# Altium PCB Encoder.PcbDoc
Units mm, origin at the board's own origin, x right, y up, seen from the top; angles counter-clockwise.
Board outline 56.4 x 60.4 mm, 2 copper layers (Top Layer, Bottom Layer); 22 components, 13 nets, 67 pads, 0 vias.
Unrouted connection lines stored in the file: 46.
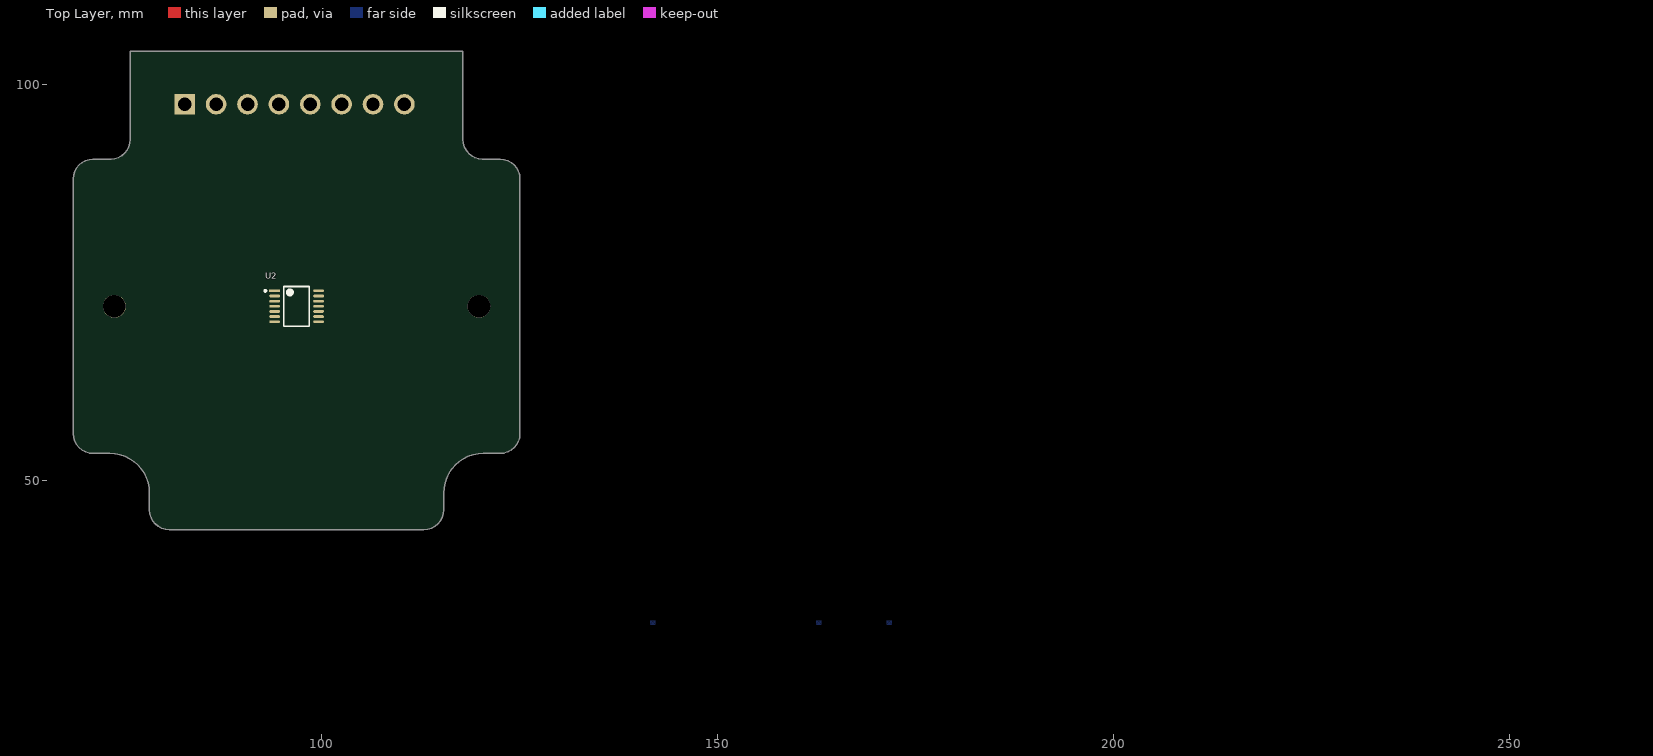
[diagram p0: Top Layer view]
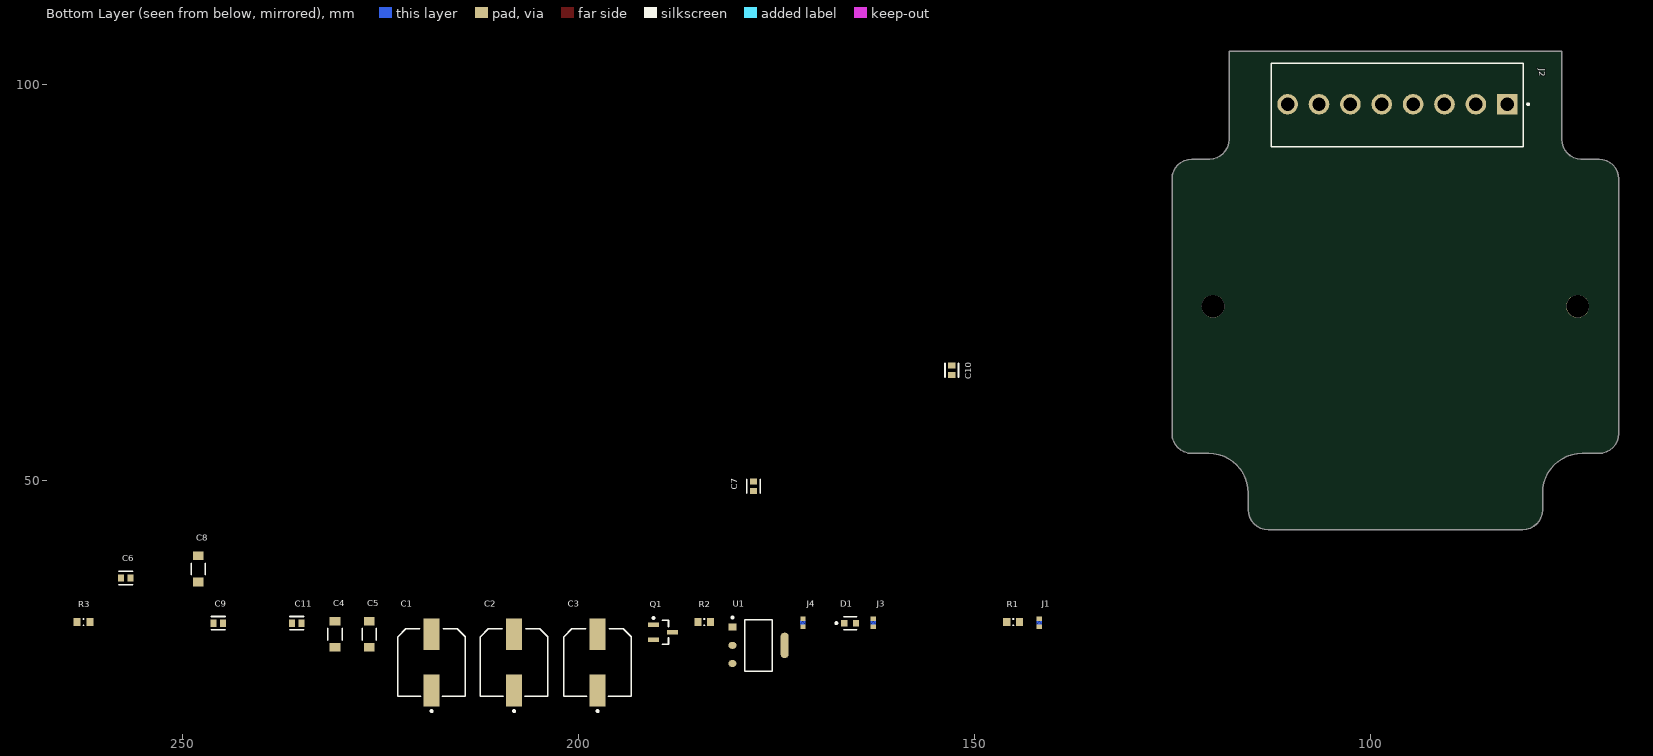
[diagram p1: Bottom Layer view, seen from below]

## Layer stack, top to bottom
Top Solder: solder mask 0.0102, Solder Resist, Dk 3.5
Top Layer: signal copper 0.0356
Dielectric 1: dielectric 0.32, FR-4, Dk 4.8
Bottom Layer: signal copper 0.0356
Bottom Solder: solder mask 0.0102, Solder Resist, Dk 3.5

## Board outline
73.331,90.579 73.471,90.581 73.949,90.641 74.406,90.791 74.826,91.026 75.193,91.337 75.494,91.713 75.717,92.139 75.855,92.601 75.901,93.08 75.901,104.209 117.901,104.209 117.901,93.08 117.947,92.601 118.085,92.139 118.308,91.713 118.609,91.337 118.976,91.026 119.396,90.791 119.853,90.641 120.331,90.581 120.471,90.579 122.601,90.579 123.089,90.531 123.558,90.389 123.99,90.158 124.369,89.847 124.68,89.468 124.911,89.036 125.053,88.567 125.101,88.079 125.101,55.939 125.053,55.451 124.911,54.982 124.68,54.55 124.369,54.171 123.99,53.86 123.558,53.629 123.089,53.487 122.601,53.439 120.471,53.439 119.818,53.396 119.177,53.269 118.558,53.058 117.971,52.769 117.427,52.406 116.935,51.975 116.504,51.483 116.141,50.939 115.852,50.352 115.641,49.733 115.514,49.092 115.471,48.439 115.471,46.309 115.423,45.821 115.281,45.352 115.05,44.92 114.739,44.541 114.36,44.23 113.928,43.999 113.459,43.857 112.971,43.809 80.831,43.809 80.343,43.857 79.874,43.999 79.442,44.23 79.063,44.541 78.752,44.92 78.521,45.352 78.379,45.821 78.331,46.309 78.331,48.439 78.288,49.092 78.161,49.733 77.95,50.352 77.661,50.939 77.298,51.483 76.867,51.975 76.375,52.406 75.831,52.769 75.244,53.058 74.625,53.269 73.984,53.396 73.331,53.439 71.201,53.439 70.713,53.487 70.244,53.629 69.812,53.86 69.433,54.171 69.122,54.55 68.891,54.982 68.749,55.451 68.701,55.939 68.701,88.079 68.749,88.567 68.891,89.036 69.122,89.468 69.433,89.847 69.812,90.158 70.244,90.389 70.713,90.531 71.201,90.579

## Design rules (kind name [scope] priority, off if disabled: settings)
Clearance [All] p1: gap=0.254 ignorepadtopadclearanceinfootprint=FALSE
PolygonConnect [All] p1: connectstyle=Relief reliefconductorwidth=0.254 reliefentries=4 polygonreliefangle="90 Angle" airgapwidth=0.254
RoutingVias [All] p1: holewidth=0.711 width=1.27 viastyle="Through Hole" minholewidth=0.711 minwidth=1.27 maxholewidth=0.711 maxwidth=1.27
SolderMaskExpansion [All] p1: expansion=0.102 istentingtop=FALSE
Width [All] p1: maxlimit=0.254 minlimit=0.254 preferedwidth=0.254
30 further rules are at their usual default settings.

## Components (designator, comment, footprint, x,y, rotation, side; value= is the part's Value field where it differs from the comment)
C1 "100u" FP-FTF-MFG 218.567,27.051 r90 bottom
C2 "100u" FP-FTF-MFG 208.153,27.051 r90 bottom
C3 "100u" FP-FTF-MFG 197.612,27.051 r90 bottom
C4 "22u" FP-C3216-085-0_2-MFG 230.759,30.607 r90 bottom
C5 "22u" FP-C3216-085-0_2-MFG 226.441,30.607 r90 bottom
C6 "100n" FP-C0603C-CF-MFG 257.175,37.719 r180 bottom value="0.10 μF"
C7 "100n" FP-C0603C-CF-MFG 177.927,49.276 r90 bottom value="0.10 μF"
C8 "22u" FP-C3216-085-0_2-MFG 248.031,38.862 r90 bottom
C9 "100n" FP-C0603C-CF-MFG 245.491,32.004 r180 bottom value="0.10 μF"
C10 "100n" FP-C0603C-CF-MFG 152.908,63.916 r90 bottom value="0.10 μF"
C11 "100n" FP-C0603C-CF-MFG 235.585,32.004 r180 bottom value="0.10 μF"
D1 "LTST-C190KRKT" FP-LTST-C190KRKT-MFG 165.735,32.004 r180 bottom
J1 "JUMPER" JUMPER 141.859,32.004 r180 bottom
J2 "26-60-4080" FP-26-60-4080-MFG 96.647,97.409 r180 bottom
J3 "JUMPER" JUMPER 162.814,32.004 r180 bottom
J4 "JUMPER" JUMPER 171.704,32.004 r180 bottom
Q1 "2N7002" INF-PG-SOT23_M 189.357,30.861 r180 bottom
R1 "220R" RESC0603(1608)_N 145.161,32.131 r180 bottom value="2000.00 Ohm"
R2 "1k" RESC0603(1608)_N 184.15,32.131 r180 bottom value="2000.00 Ohm"
R3 "100k" RESC0603(1608)_N 262.509,32.131 r180 bottom value="2000.00 Ohm"
U1 "AMS1117-3.3" FP-AMS1117-IPC_C 177.292,29.21 r180 bottom
U2 "AS5048A-HTSP-500" FP-AS5048A-HTSP-500-IPC_C 96.901,72.009 r0 top

## Footprints (in the part's own frame and the unit in brackets; to place one, negate y for a bottom-side part, rotate by r counter-clockwise, add the part's x,y. Pads: shape width x height; smd on the part's side, far side on the other; paste and mask are expansions set on the pad)
FP-26-60-4080-MFG [mm]
  rect 2.6x2.6 hole 1.7 paste-2539.97 mask+0: 1(13.86,0.105)
  round 2.6 hole 1.7 paste-2539.97 mask+0: 2(9.9,0.105) 3(5.94,0.105) 4(1.98,0.105) 5(-1.98,0.105) 6(-5.94,0.105) 7(-9.9,0.105) 8(-13.86,0.105)
  silkscreen extent -15.9,-5.26 16.62,5.26, body extent -15.77,-5.01 15.77,5, height 15.36
FP-AMS1117-IPC_C [mm]
  rect 1.004x0.872 smd paste+0 mask+0: 1(-3.295,2.29)
  rrect100% 1.004x0.872 smd paste+0 mask+0: 2(-3.295,0) 3(-3.295,-2.29)
  rrect87% 1.004x3.182 smd paste+0 mask+0: 4(3.295,0)
  silkscreen extent -3.42,-3.25 1.75,3.62, body extent -3.53,-3.25 3.53,3.25, height 1.8
FP-AS5048A-HTSP-500-IPC_C [mm]
  rect 1.355x0.341 smd paste+0 mask+0: 1(-2.775,1.95)
  rrect100% 1.355x0.341 smd paste+0 mask+0: 2(-2.775,1.3) 3(-2.775,0.65) 4(-2.775,0) 5(-2.775,-0.65) 6(-2.775,-1.3) 7(-2.775,-1.95) 8(2.775,-1.95) 9(2.775,-1.3) 10(2.775,-0.65) 11(2.775,0) 12(2.775,0.65) 13(2.775,1.3) 14(2.775,1.95)
  silkscreen extent -4.08,-2.5 1.6,2.5
FP-C0603C-CF-MFG [mm]
  rect 0.75x0.9 smd paste+0 mask+0: 1(-0.6,0) 2(0.6,0)
  silkscreen extent -0.87,-0.85 0.88,0.85, body extent -0.8,-0.4 0.8,0.4, height 0.87
FP-C3216-085-0_2-MFG [mm]
  rect 1.1x1.35 smd paste+0 mask+0: 1(-1.65,0) 2(1.65,0)
  silkscreen extent -0.72,-0.9 0.72,0.9, body extent -1.6,-0.8 1.6,0.8, height 1
FP-FTF-MFG [mm]
  rect 4x2 smd paste+0 mask+0: 1(-3.55,0) 2(3.55,0)
  silkscreen extent -6.27,-4.25 4.25,4.25, body extent -4.85,-4.15 4.85,4.15, height 10.5
FP-LTST-C190KRKT-MFG [mm]
  rect 0.8x0.8 smd paste+0 mask+0: 1(-0.75,0) 2(0.75,0)
  silkscreen extent -1.86,-0.82 0.82,0.82, body extent -0.8,-0.4 0.8,0.4, height 0.9
INF-PG-SOT23_M [mm] "SOT23, 3-Leads, Body 2.9x1.3mm, Pitch 0.95mm, IPC Low Density"
  rect 1.35x0.6 smd: 1(-1.2,0.95) 2(-1.2,-0.95) 3(1.2,0)
  silkscreen extent -1.33,-1.5 0.7,1.92, body extent -0.7,-1.5 0.7,1.5, height 1.1
JUMPER [mm]
  rect 0.65x0.55 smd paste-2.54 mask-2.54: 1(0,-0.45) 2(0,0.55)
  Top Layer region: -0.325,-0.175 0.003,0.152 0.325,-0.175
  Top Layer region: -0.325,-0.041 0,0.284 0.325,-0.041 0.325,0.317 -0.325,0.318
RESC0603(1608)_N [mm] "Chip Resistor, Body 1.6x0.8mm, IPC Medium Density"
  rect 0.9x1 smd: 1(-0.8,0) 2(0.8,0)
  silkscreen extent -0.05,-0.4 0.05,0.4, body extent -0.85,-0.47 0.85,0.47, height 0.6

## Part data
C1 C2 C3: library part CMP-05427-000092-1, "CAP ALUM 220UF 20% 50V SMD", Capacitance=220uF, Case/Package=Radial, Dielectric Material=Aluminium, ESR (Equivalent Series Resistance)=180mR, Leakage Current=110uA, Max Operating Temperature=105°C, Min Operating Temperature=-55°C, Package Quantity=500, Ripple Current=670mA, Tolerance=20%, Voltage=50V, Construction=Cylindrical, Contact Plating=Tin, Diameter=8mm, Height=10.2mm, Height - Seated (Max)=0.413inch, Lead Diameter=0.9mm, Lead Free="Lead Free", Lead Pitch=3.1mm, Length=10.2mm, Life (Hours)=2000Hour, Mount="Surface Mount", Number of Pins=2, Packaging="Tape and Reel", Radiation Hardening=No, REACH SVHC="No SVHC", Ripple Current (AC)=670mA, RoHS Compliant=Yes, Series=FT, Termination=SMD/SMT, Voltage Rating=50V, Voltage Rating (DC)=50V
C4 C5 C8: library part CMP-08246-004858-1, "Multilayer Ceramic Capacitors 22μF ±20% 6.3V X5R SMD 1206", Capacitance=22uF, Case Code (Imperial)=1206, Case Code (Metric)=3216, Dielectric=X5R, Dielectric Material=Ceramic, Max Operating Temperature=85°C, Min Operating Temperature=-55°C, Package Quantity=1, Tolerance=20%, Voltage Rating=6.3V, Case/Package=1206, Depth=1.6mm, Height=0.85mm, Lead Free="Lead Free", Length=0.126inch, Mount="Surface Mount", Number of Pins=2, Packaging="Cut Tape", REACH SVHC="No SVHC", Resistor Type=Ceramic, RoHS Compliant=Yes, Series=C, Termination=SMD/SMT, Thickness=0.037inch, Voltage Rating (DC)=6.3V, Weight=0.000571oz, Width=0.063inch
C6 C7 C9 C10 C11: library part CMP-2006-03061-2, "CAP CER 0.1UF 50V X7R 0603", Capacitance="0.10 μF", Manufacturer=KEMET, Manufacturer Part Number=C0603C104K5RACTU, Package=C0603C-CF, Temperature="-55°C to +125°C", Temperature Characteristic=X7R, Temperature Coefficient=30ppm/°C, Temperature Range High=+125°C, Temperature Range Low=-55°C, Tolerance=0.1, Voltage Rating="50 V", Automotive=Yes, Automotive Grade="Grade 1", Category=Cap, ComponentLink2Description=Datasheet, ComponentLink2URL=https://api.kemet.com/component-edge/download/datasheet/C0603C100J5GACAUTO.pdf, Device Class L1="Passive Components", Device Class L2=Capacitors, Device Class L3="Ceramic Capacitors", Digikey Description="CAP CER 0.1UF 50V X7R 0603", Height=0.87mm, Lead Free=Yes, Material=Ceramic, Octopart=https://octopart.com/c0603c104k5ractu-kemet-139244, RoHS=TRUE
D1: library part CMP-1674-00011-2, "LED RED CLEAR CHIP SMD", Case Code (Imperial)=0603, Case Code (Metric)=1608, Color=Red, Forward Current=30mA, Forward Voltage=2.4V, Lens Color=Colorless, Max Operating Temperature=85°C, Min Operating Temperature=-55°C, Package Quantity=1, Power Dissipation=75mW, Reverse Voltage=5V, Test Current=20mA, Case/Package=0603, Depth=0.8mm, Dominant Wavelength=631nm, Height=0.8mm, Illumination Color=Red, Lead Free="Lead Free", Length=1.6mm, Lens Style=Diffused, Lens Transparency=Clear, Luminous Intensity=54mcd, Mount="Surface Mount", Number of Elements=1, Number of LEDs=1, Number of Pins=2, Packaging="Tape and Reel", Power Rating=75mW, Radiation Hardening=No, Viewing Angle=130°, Wavelength=639nm, Width=0.8mm
J1 J3 J4: library part CMP-009-00061-2, Pins=2
J2: library part CMP-00257-00111878-1, "26-60-4080 3.96mm (.156\") Pitch KK® Solid Header, Vertical, Friction Lock, 8 Circuits, Tin (Sn) Plating", Color=Natural, Contact Resistance=6mΩ, Current Rating=7A, Flammability Rating="UL94 V-0", Insulation Resistance=50GΩ, Manufacturer Lifecycle Status=ACTIVE, Max Operating Temperature=75°C, Max Voltage Rating (AC)=250V, Min Operating Temperature=-40°C, Approvals="CSA, UL", Contact Gender=Male, Contact material="Brass, Tin", Contact Plating=Tin, Country of Origin=US, Depth=10.01mm, Gender=Male, Glow Wire Compliant=Non-compliant, Height=14.73mm, Housing Color=Natural, Housing material=Polyester, Lead Free="Lead Free", Lead Pitch=3.96mm, Length=31.55mm, Lifecycle Status=Production, Material=Polyester, Max Current Rating=7A, Mount="Through Hole", NexarPartId=111878, Number of Circuits=8, Number of Contacts=8, Number of Lines=1, Number of Pins=8, Number of Poles=8, Number of Positions=8, Number of Rows=1, Orientation=Vertical, Packaging=Bulk, Pitch=3.96mm, Plating=Tin, Radiation Hardening=No, REACH SVHC=Unknown, RoHS=Compliant, Schedule B=8536694040, Termination=Solder, Voltage Rating=250V, Voltage Rating (AC)=250V, Voltage Rating (DC)=250V
Q1: library part CMP-1149-00026-1, "N-Channel OptiMOS Small-Signal-Transistor, 60 V VDS, 0.3 A ID, -55 to 150 degC, PG-SOT23, Reel, Green", Manufacturer=Infineon, ComponentLink1Description="Manufacturer URL", ComponentLink1URL=http://www.infineon.com/, ComponentLink2Description=Datasheet, ComponentLink2URL=http://www.infineon.com/dgdl/2N7002_Rev2.4.pdf?folderId=db3a3043156fd573011622e10b5c1f67&fileId=db3a304319bc939a0119c2a9461e79e6, ComponentLink3Description="Package Specification", ComponentLink3URL=http://www.infineon.com/dgdl/SOT23-Package_Overview.pdf?folderId=db3a30431936bc4b0119532290053c66&fileId=db3a30431936bc4b0119533468123c85, DatasheetVersion="Rev. 2.4", Green=TRUE, Halogen-free=TRUE, ID (max)="0.3Â A", IDpuls (max)="1.2Â A", Mounting Technology="Surface Mount", PackageDescription="3-Pin Small Outline Transistor Package, 2.9 x 1.3 mm Body, 0.95 mm Pitch", PackageReference=PG-SOT23, PackageVersion=Apr-08, Packing=Reel, PartNumber=2N7002, Ptot (max)="0.5Â W", QG="0.4Â nC", RDS (on) (max)="3,000 mOhm", RDS (on) (max) (@4.5V)="4,000 mOhm", RthJA (max)="250 K/W", VDS (max)="60 V", VGS(th) (max)="2.5Â V", VGS(th) (min)="1.5Â V"
R1: library part CMP-1012-00081-1, "0.1W 1% 0603 (1608 Metric)  SMD", Case-EIA=0603, Case-Metric=1608, Power="0.1 W", Tolerance="5 %", Technology=SMT
R2 R3: library part CMP-1012-00081-1, "2K 0.1W 5% 0603 (1608 Metric)  SMD", Case-EIA=0603, Case-Metric=1608, Power="0.1 W", Tolerance="5 %", Technology=SMT
U1: library part CMP-209535-000001-1, "LDO Voltage Regulators 1A, 3.3V", Dropout Voltage=1.1V, Manufacturer="Advanced Monolithic Systems", Max Junction Temp=+125°C, Max Power Dissipation=1.2W, Max Supply Voltage=15V, Nominal Supply Current=5mA, Output Current=1A, Output Voltage=3.3V, Package=AMS1117, Temperature="-40°C to +125°C", Temperature Range Low=-40°C, Automotive=No, Category=IC, ComponentLink2Description=Datasheet, ComponentLink2URL=http://www.advanced-monolithic.com/pdf/ds1117.pdf, Device Class L1="Integrated Circuits (ICs)", Device Class L2="Power Management ICs", Device Class L3="Voltage Regulators - Linear", Height=1.8mm, Ipc Land Pattern Name=SOT229P700X180-4, Lead Free=Yes, Manufacturer Part Number=AMS1117-3.3, Number Of Outputs=1, Octopart=https://octopart.com/ams1117-3.3-advanced+monolithic+systems-25899300, Output Type=Fixed, RoHS=TRUE, Standoff Height=0.64mm, Temperature Range High=+125°C
U2: library part CMP-22826-000004-1, "SENSOR ANGLE 360DEG SMD", Case/Package=TSSOP, Max Operating Temperature=150°C, Max Supply Voltage=5.5V, Min Operating Temperature=-40°C, Min Supply Voltage=4.5V, Operating Supply Current=15mA, Package Quantity=500, Lead Free="Lead Free", Mount="Surface Mount", Packaging="Tape and Reel", Resolution=14b, Sensing Method="Hall Effect", Termination=SMD/SMT

## Free pads (board coordinates)
  round 2.87 hole 2.87: 1(73.888,72.009) 1(119.913,72.009)

## Nets (pads, with @x,y where several pads share a name; then routed paths per layer and width w, separated by ;. In a path a pad name is that pad's centre, name@x,y a point inside that pad or via, vN(x,y) a via of type N, cw(c..) or ccw(c..) an arc to the next point about the centre after c; other vN are vias at no path point)
3V3: J2.8 J3.1
+5: C1.2 C4.1 C6.1 J1.1 J2.7 U1.3
CLK: J2.6 U2.2
CS: J2.2 U2.1
GND: C1.1 C2.1 C3.1 C4.2 C5.2 C6.2 C7.2 C8.2 C9.2 C10.2 C11.2 J2.1 J2.5 Q1.2 R3.2 U1.1 U2.13
MISO: J2.4 U2.3
MOSI: J2.3 U2.4
NetC2_2: C2.2 C3.2 C5.1 C7.1 C8.1 C9.1 C10.1 C11.1 J1.2 J3.2 J4.2 R1.2 U2.11 U2.12
NetD1_1: D1.1 Q1.3
NetD1_2: D1.2 R1.1
NetJ4_1: J4.1 U1.2 U1.4
NetQ1_1: Q1.1 R2.1 R3.1
NetR2_2: R2.2 U2.14
pads on no net: U2.5 U2.6 U2.7 U2.8 U2.9 U2.10